# Altium PCB PCB1.PcbDoc
Units mm, origin at the board's own origin, x right, y up, seen from the top; angles counter-clockwise.
Board outline 60 x 60 mm, 4 copper layers (Top Layer, Signal Layer 1, Signal Layer 2, Bottom Layer), stack 0.778 mm thick; 15 components, 201 nets, 400 pads, 10 vias.
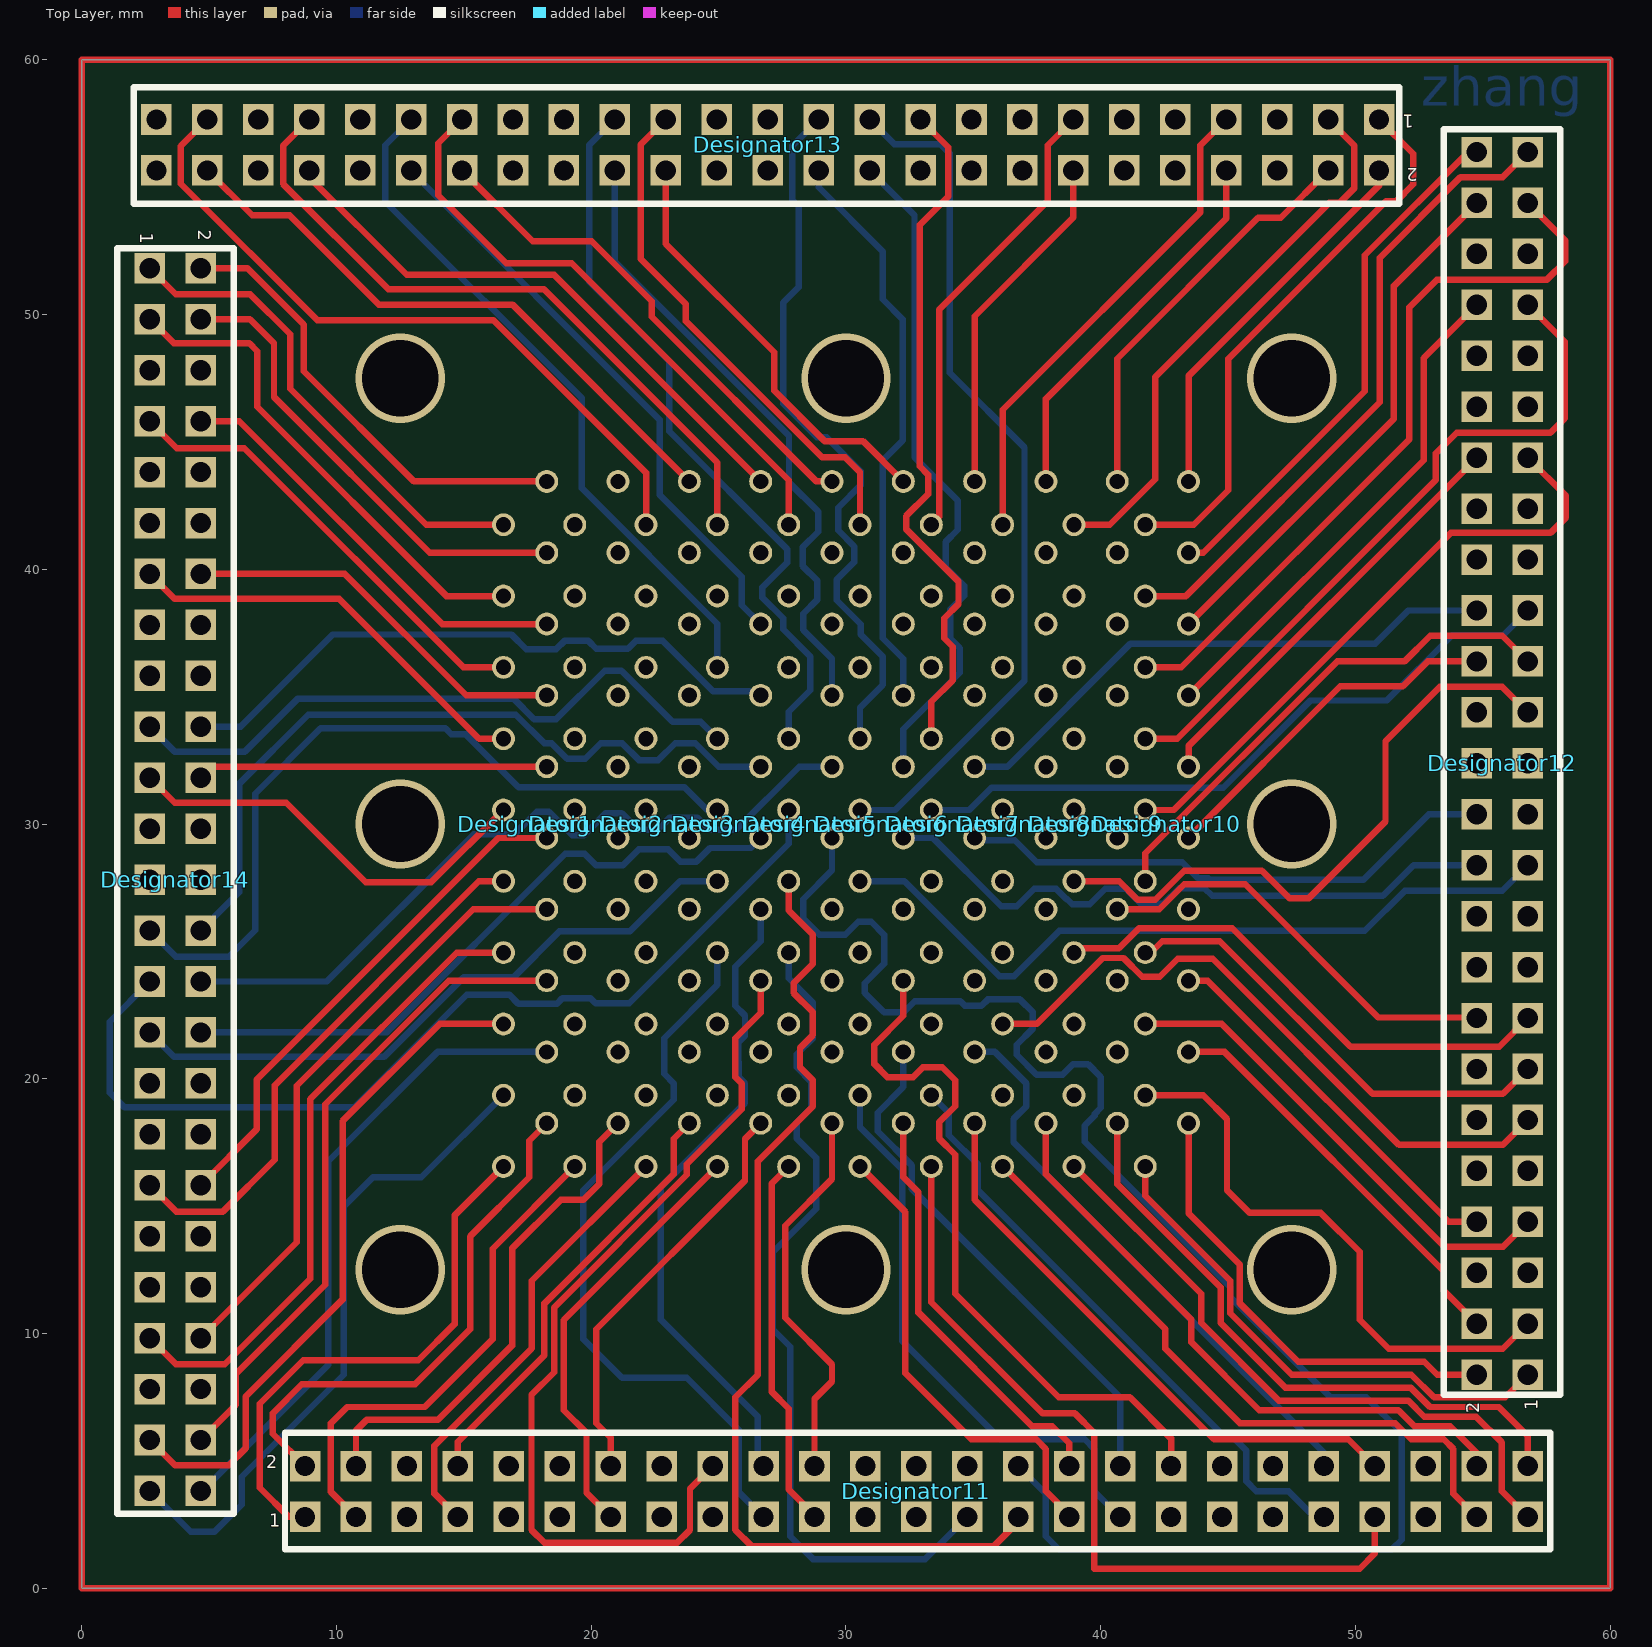
[diagram p0: Top Layer view]
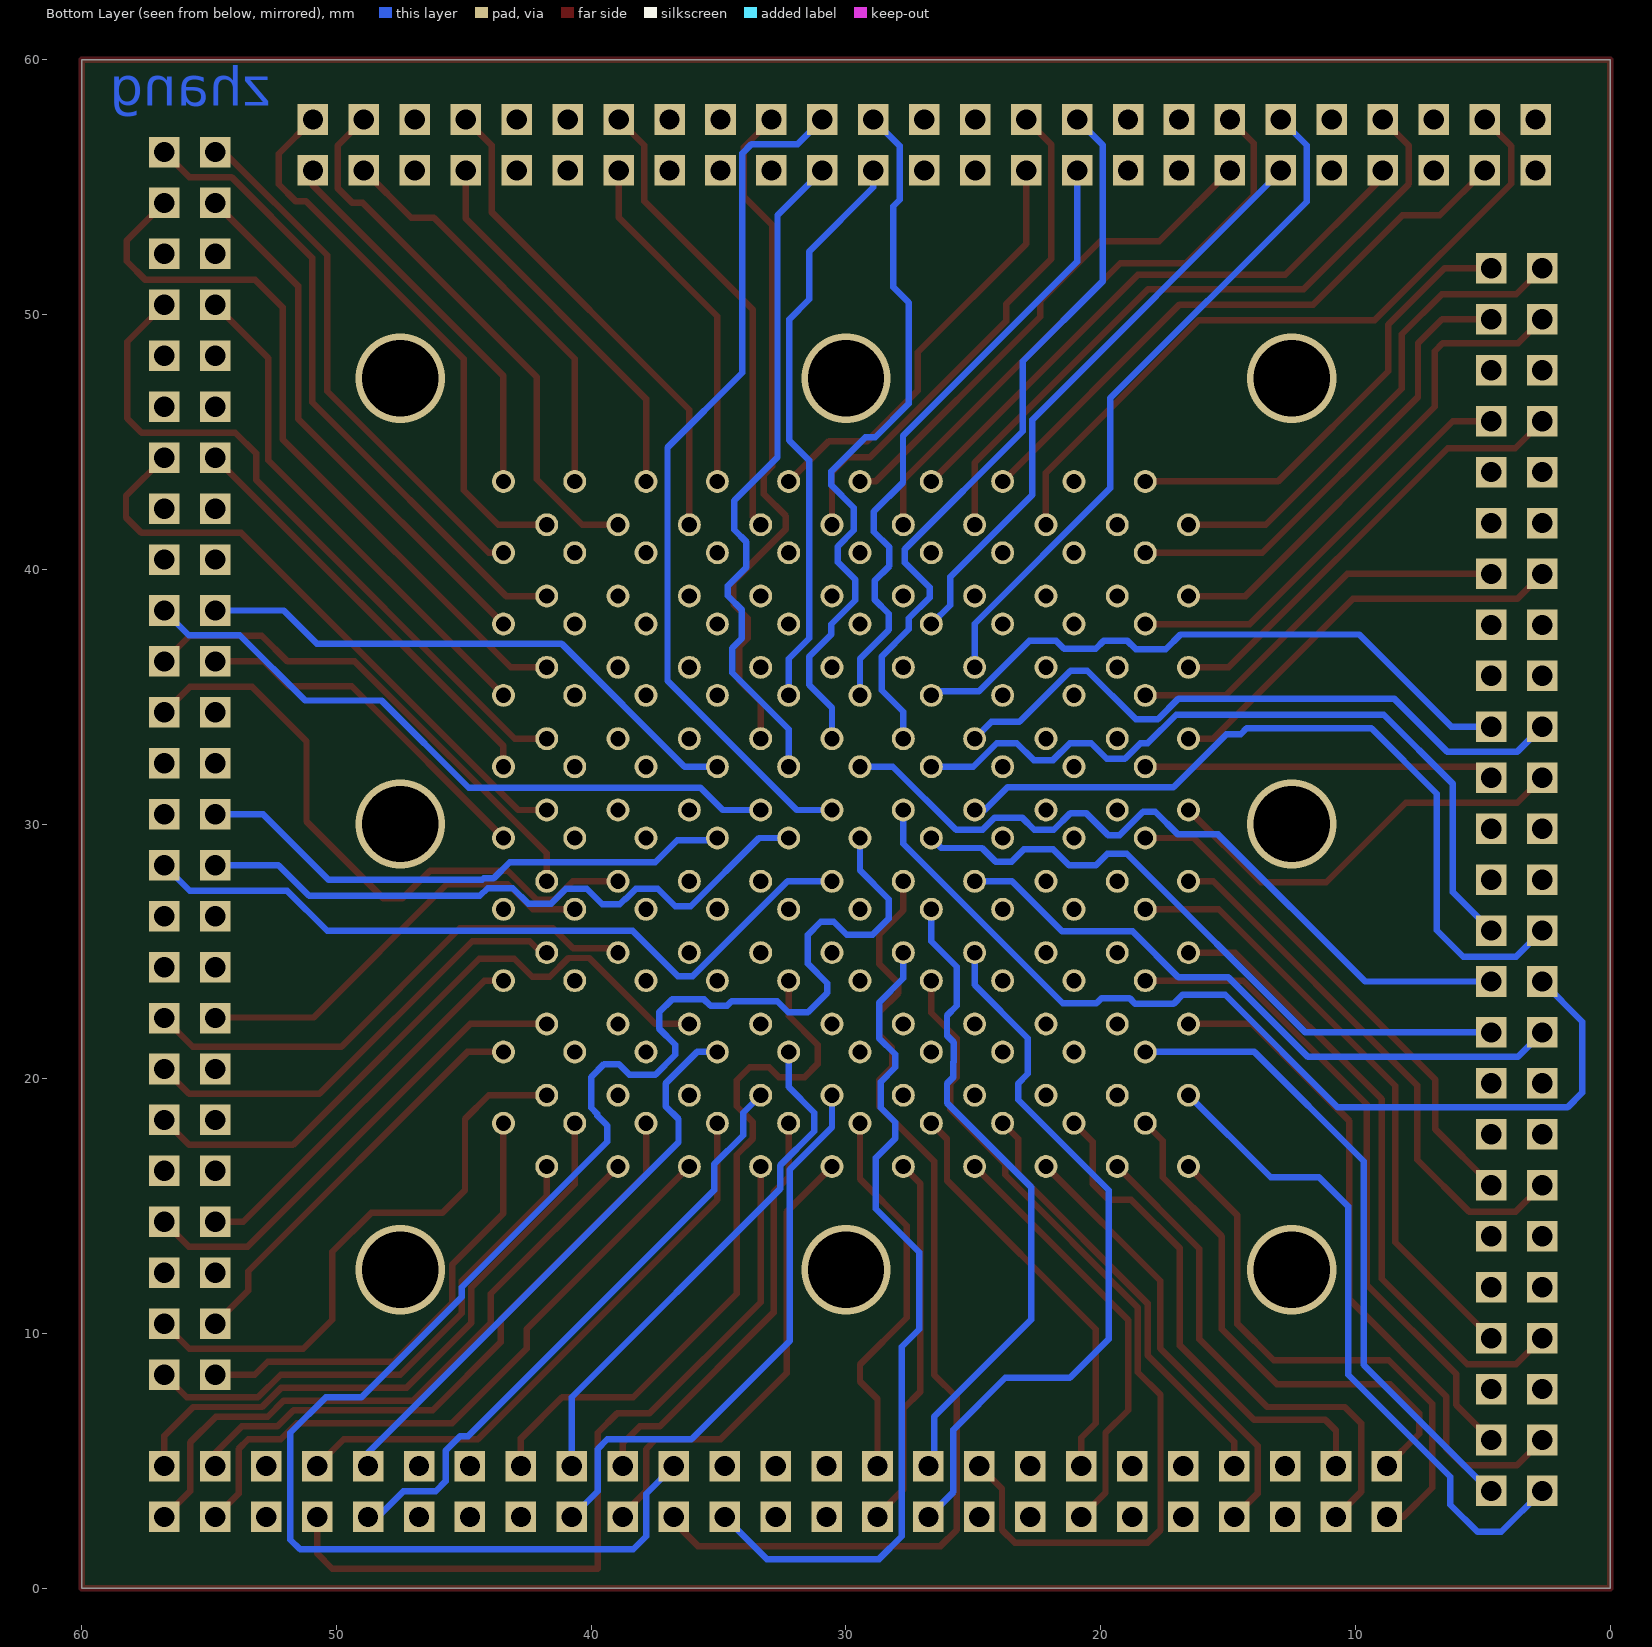
[diagram p1: Bottom Layer view, seen from below]
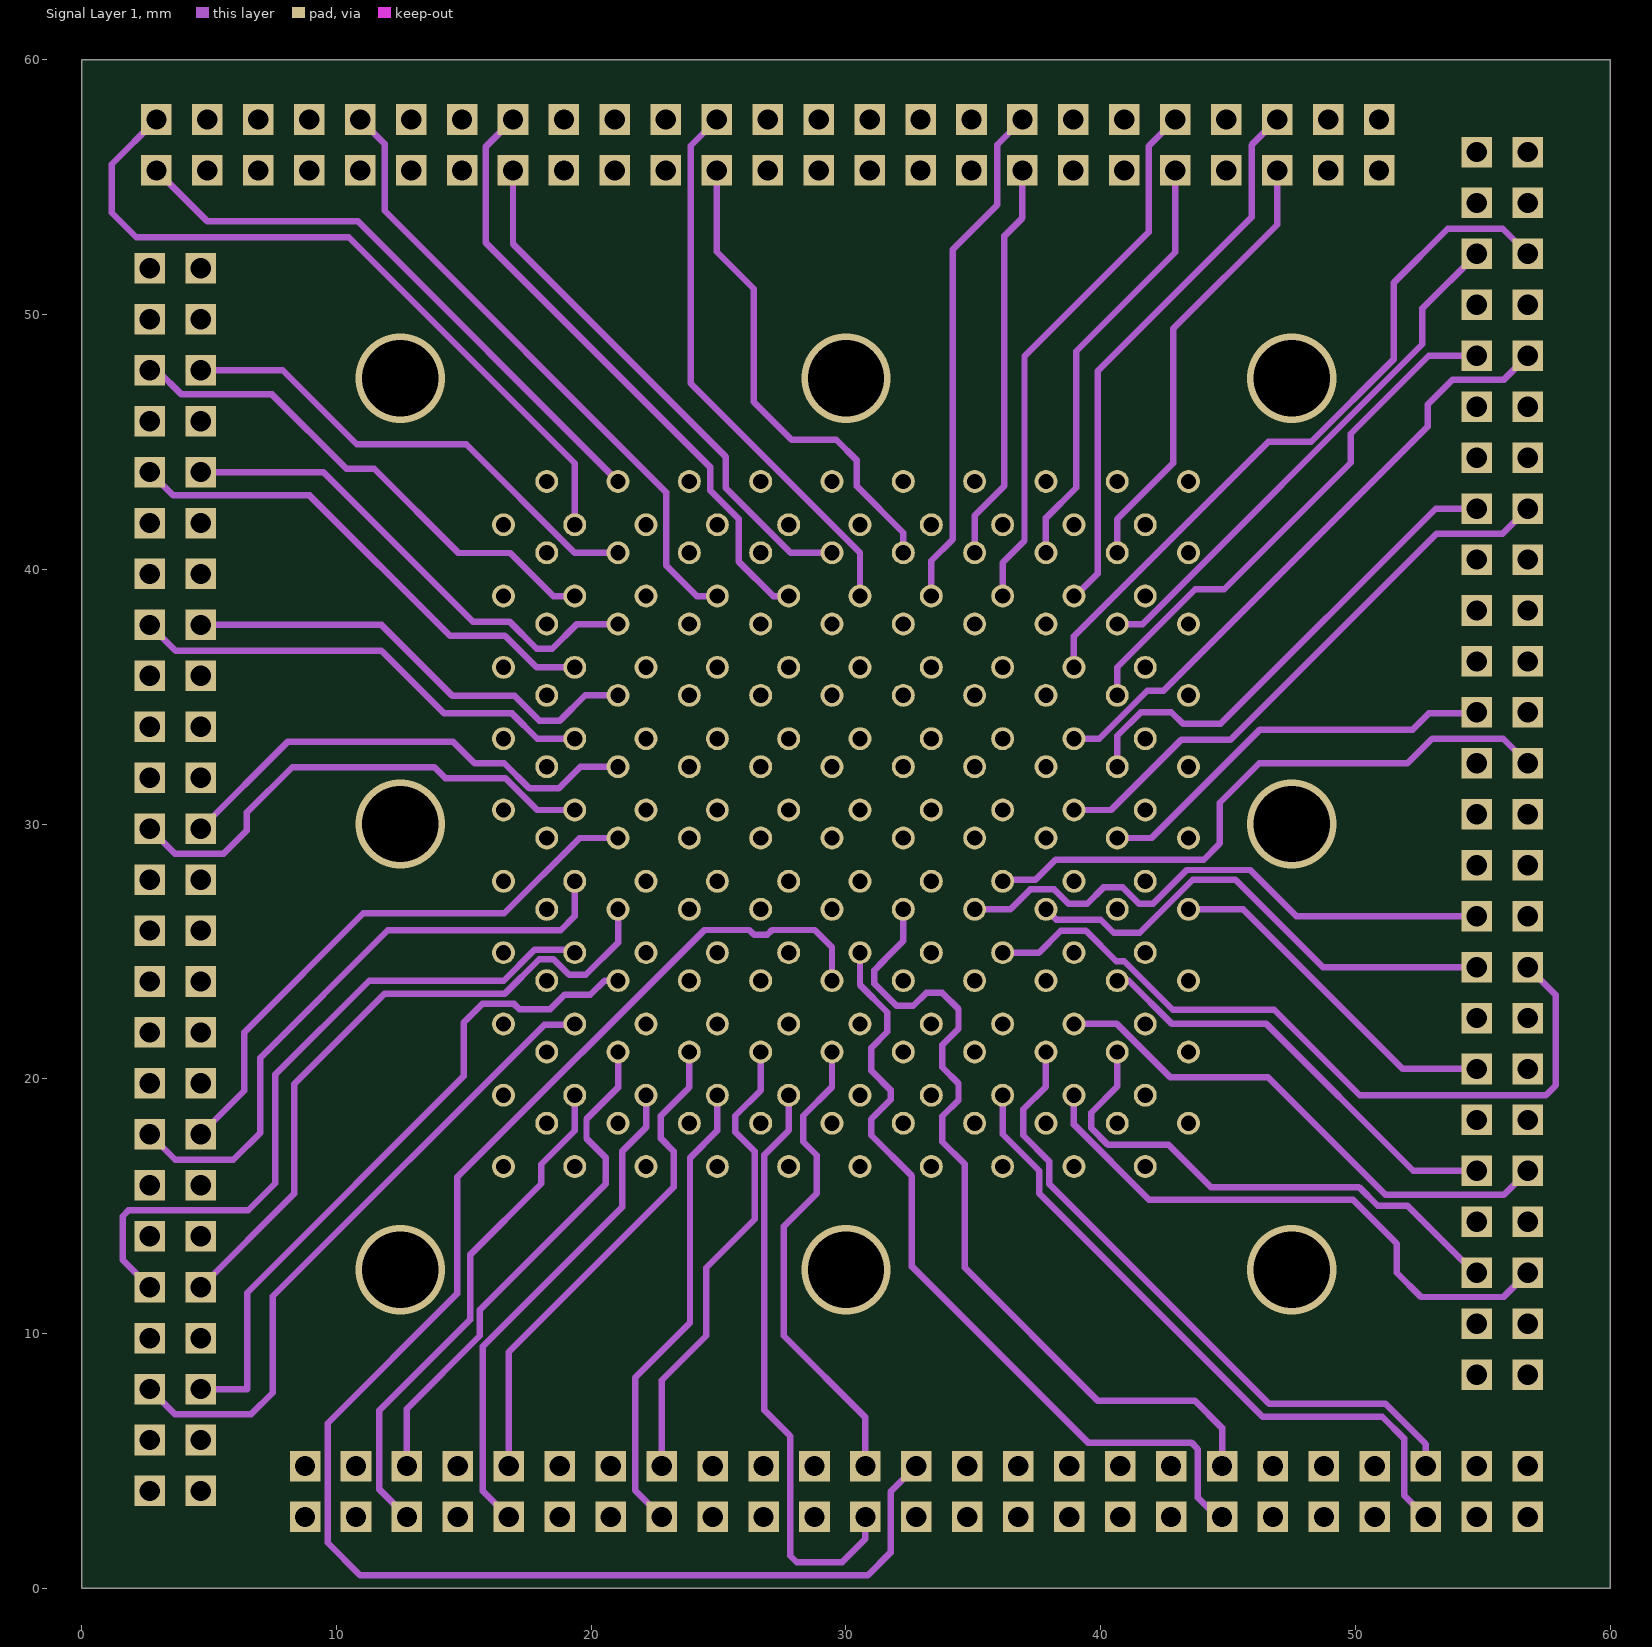
[diagram p2: Signal Layer 1]
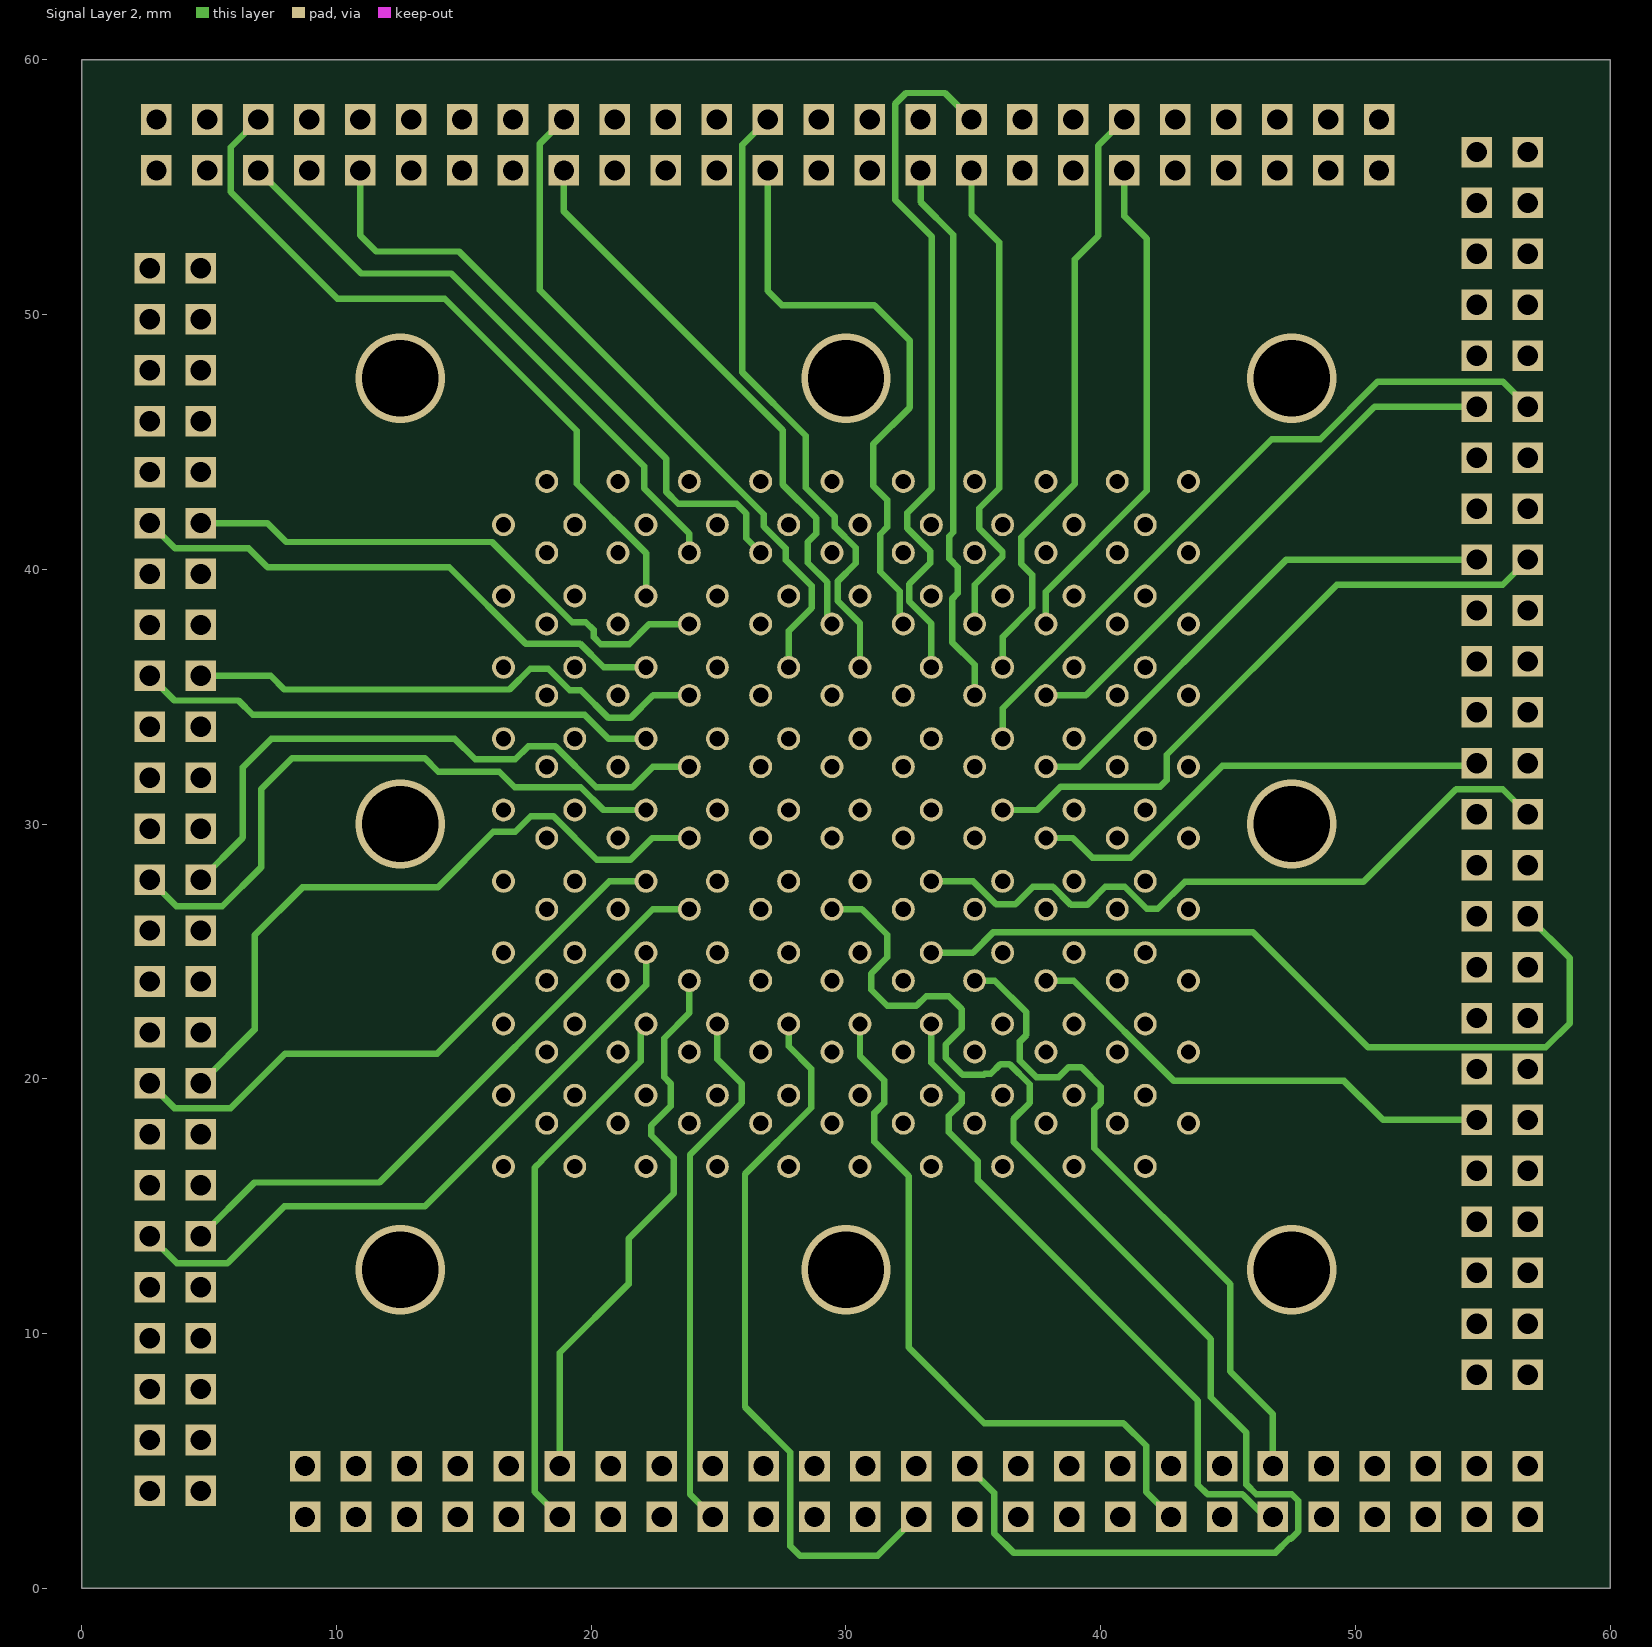
[diagram p3: Signal Layer 2]

## Layer stack, top to bottom
Top Solder: solder mask 0.0102, Solder Resist, Dk 3.5
Top Layer: signal copper 0.0356
3: core 0.254, FR-4, Dk 4.2
Signal Layer 1: signal copper 0.036
Dielectric 3: prepreg 0.127, Dk 4.2
Signal Layer 2: signal copper 0.036
4: core 0.254, Dk 4.2
Bottom Layer: signal copper 0.0356
Bottom Solder: solder mask 0.0102, Solder Resist, Dk 3.5

## Board outline
0,0 60,0 60,60 0,60

## Design rules (kind name [scope] priority, off if disabled: settings)
Clearance [All] p1: gap=0.127 ignorepadtopadclearanceinfootprint=FALSE except(0: Arc-Hole Track-Hole SMDPad-Hole THPad-Hole Via-Hole Fill-Hole Poly-Hole Region-Hole Text-Hole)
PolygonConnect [All] p1: connectstyle=Relief reliefconductorwidth=0.254 reliefentries=4 polygonreliefangle="90 Angle" airgapwidth=0.254
RoutingVias [All] p1: holewidth=0.711 width=1.27 viastyle="Through Hole" minholewidth=0.711 minwidth=1.27 maxholewidth=3.81 maxwidth=3.81
SolderMaskExpansion [All] p1: expansion=0.102
Width [All] p1: maxlimit=0.254 minlimit=0.254 preferedwidth=0.254
30 further rules are at their usual default settings.

## Components (designator, comment, footprint, x,y, rotation, side; value= is the part's Value field where it differs from the comment)
Designator1 "Comment" ZHANG10 16.55,16.55 r0 top
Designator2 "Comment" ZHANG10 19.35,16.55 r0 top
Designator3 "Comment" ZHANG10 22.15,16.55 r0 top
Designator3_7 "Comment" zhang 16.55,2539.975 r0 top
Designator4 "Comment" ZHANG10 24.95,16.55 r0 top
Designator5 "Comment" ZHANG10 27.75,16.55 r0 top
Designator6 "Comment" ZHANG10 30.55,16.55 r0 top
Designator7 "Comment" ZHANG10 33.35,16.55 r0 top
Designator8 "Comment" ZHANG10 36.15,16.55 r0 top
Designator9 "Comment" ZHANG10 38.95,16.55 r0 top
Designator10 "Comment" ZHANG10 41.75,16.55 r0 top
Designator11 "Comment" header-2MM#1 8.763,2.794 r90 top
Designator12 "Comment" header-2MM#2 56.769,8.382 r180 top
Designator13 "Comment" header-2MM#2 50.927,57.658 r270 top
Designator14 "Comment" header-2MM#2 2.667,51.816 r0 top

## Footprints (in the part's own frame and the unit in brackets; to place one, negate y for a bottom-side part, rotate by r counter-clockwise, add the part's x,y. Pads: shape width x height; smd on the part's side, far side on the other; paste and mask are expansions set on the pad)
header-2MM#1 [mm]
  rect 1.199x1.199 hole 0.798: 1(0,0) 2(2,0) 3(0,-2) 4(2,-2) 5(0,-4) 6(2,-4) 7(0,-6) 8(2,-6) 9(0,-8) 10(2,-8) 11(0,-10) 12(2,-10) 13(0,-12) 14(2,-12) 15(0,-14) 16(2,-14) 17(0,-16) 18(2,-16) 19(0,-18) 20(2,-18) 21(0,-20) 22(2,-20) 24(2,-22) 25(0,-24) 26(2,-24) 27(0,-26) 28(2,-26) 29(0,-28) 30(2,-28) 31(0,-30) 32(2,-30) 33(0,-32) 34(2,-32) 35(0,-34) 36(2,-34) 37(0,-36) 38(2,-36) 39(0,-38) 40(2,-38) 41(0,-40) 42(2,-40) 43(0,-42) 44(2,-42) 45(0,-44) 46(2,-44) 47(0,-46) 48(2,-46) 49(0,-48) 50(2,-48)
  rect 1.199x1.199 hole 0.798 mask+0.102: 23(0,-22)
  silkscreen extent -1.27,-48.89 3.3,0.79
header-2MM#2 [mm]
  rect 1.199x1.199 hole 0.798: 1(0,0) 2(2,0) 3(0,-2) 4(2,-2) 5(0,-4) 6(2,-4) 7(0,-6) 8(2,-6) 9(0,-8) 10(2,-8) 11(0,-10) 12(2,-10) 13(0,-12) 14(2,-12) 15(0,-14) 16(2,-14) 17(0,-16) 18(2,-16) 19(0,-18) 20(2,-18) 21(0,-20) 22(2,-20) 23(0,-22) 24(2,-22) 25(0,-24) 26(2,-24) 27(0,-26) 28(2,-26) 29(0,-28) 30(2,-28) 31(0,-30) 32(2,-30) 33(0,-32) 34(2,-32) 35(0,-34) 36(2,-34) 37(0,-36) 38(2,-36) 39(0,-38) 40(2,-38) 41(0,-40) 42(2,-40) 43(0,-42) 44(2,-42) 45(0,-44) 46(2,-44) 47(0,-46) 48(2,-46) 49(0,-48) 50(2,-48)
  silkscreen extent -1.27,-48.89 3.3,0.79
zhang [mm]
ZHANG10 [mm]
  round 0.9 hole 0.6: 1(0,0) 2(1.7,1.7) 3(0,2.8) 4(1.7,4.5) 5(0,5.6) 6(1.7,7.3) 7(0,8.4) 8(1.7,10.1) 9(0,11.2) 10(1.7,12.9) 11(0,14) 12(1.7,15.7) 13(0,16.8) 14(1.7,18.5) 15(0,19.6) 16(1.7,21.3) 17(0,22.4) 18(1.7,24.1) 19(0,25.2) 20(1.7,26.9)

## Via types
v1: diameter 3.5, hole 3, Top Layer to Bottom Layer, 8 vias
v2: diameter 1.27, hole 0.711, Top Layer to Bottom Layer, 2 vias

## Nets (pads, with @x,y where several pads share a name; then routed paths per layer and width w, separated by ;. In a path a pad name is that pad's centre, name@x,y a point inside that pad or via, vN(x,y) a via of type N, cw(c..) or ccw(c..) an arc to the next point about the centre after c; other vN are vias at no path point)
101: Designator1.1 Designator11.1 | length 21.5
  Top Layer w0.254: Designator11.1 8.128,2.794 6.985,3.937 6.985,7.239 8.692,8.946 13.208,8.946 14.631,10.369 14.631,14.631 Designator1.1
102: Designator1.2 Designator11.2 | length 21
  Top Layer w0.254: Designator11.2 7.493,6.064 7.493,6.858 8.636,8.001 13.081,8.001 15.24,10.16 15.24,13.803 17.566,16.129 17.566,17.566 Designator1.2
103: Designator1.3 Designator14.49 | length 26.2
  Bottom Layer w0.254: Designator14.49 4.273,2.21 5.207,2.21 6.274,3.277 6.274,4.369 10.287,8.382 10.287,14.986 11.43,16.129 13.329,16.129 Designator1.3
104: Designator1.4 Designator14.50 | length 25.4
  Bottom Layer w0.254: Designator14.50 4.73,3.816 9.677,8.763 9.677,16.764 13.963,21.05 Designator1.4
105: Designator1.5 Designator14.47 | length 26.8
  Top Layer w0.254: Designator14.47 3.657,4.826 5.766,4.826 6.426,5.486 6.426,7.518 10.236,11.328 10.236,18.339 14.047,22.15 Designator1.5
106: Designator1.6 Designator14.48 | length 25.9
  Top Layer w0.254: Designator14.48 6.045,7.194 6.045,8.407 9.55,11.913 9.55,18.999 14.401,23.85 Designator1.6
107: Designator1.7 Designator14.43 | length 25.1
  Top Layer w0.254: Designator14.43 3.695,8.788 5.613,8.788 8.966,12.141 8.966,19.202 14.714,24.95 Designator1.7
108: Designator1.8 Designator14.44 | length 24.2
  Top Layer w0.254: Designator14.44 8.433,13.582 8.433,19.721 15.362,26.65 Designator1.8
109: Designator1.9 Designator14.37 | length 21.4
  Top Layer w0.254: Designator14.37 3.7,14.783 5.537,14.783 7.569,16.815 7.569,19.736 15.583,27.75 Designator1.9
110: Designator1.10 Designator14.38 | length 20.4
  Top Layer w0.254: Designator14.38 6.858,18.007 6.858,19.964 16.344,29.45 Designator1.10
111: Designator1.11 Designator14.21 | length 16.8
  Top Layer w0.254: Designator14.21 3.647,30.836 8.026,30.836 11.151,27.711 13.711,27.711 Designator1.11
112: Designator1.12 Designator14.22 | length 13.8
  Top Layer w0.254: Designator14.22 5.101,32.25 Designator1.12
113: Designator1.13 Designator14.13 | length 16.6
  Top Layer w0.254: Designator14.13 3.646,38.837 10.109,38.837 15.596,33.35 Designator1.13
114: Designator1.14 Designator14.14 | length 15.6
  Top Layer w0.254: Designator14.14 10.324,39.816 15.09,35.05 Designator1.14
115: Designator1.15 Designator14.7 | length 17.9
  Top Layer w0.254: Designator14.7 3.728,44.755 6.375,44.755 14.98,36.15 Designator1.15
116: Designator1.16 Designator14.8 | length 16.9
  Top Layer w0.254: Designator14.8 6.178,45.816 14.144,37.85 Designator1.16
117: Designator1.17 Designator14.3 | length 19.7
  Top Layer w0.254: Designator14.3 3.613,48.87 6.579,48.87 6.883,48.565 6.883,46.38 14.314,38.95 Designator1.17
118: Designator1.18 Designator14.4 | length 18.6
  Top Layer w0.254: Designator14.4 6.597,49.816 7.544,48.87 7.544,46.761 13.655,40.65 Designator1.18
119: Designator1.19 Designator14.1 | length 19.3
  Top Layer w0.254: Designator14.1 3.683,50.8 6.604,50.8 8.179,49.225 8.179,47.092 13.52,41.75 Designator1.19
120: Designator1.20 Designator14.2 | length 18.1
  Top Layer w0.254: Designator14.2 6.502,51.816 8.712,49.606 8.712,47.777 13.04,43.45 Designator1.20
201: Designator2.1 Designator11.3 | length 19.9
  Top Layer w0.254: Designator11.3 9.779,3.778 9.779,6.477 10.414,7.112 13.462,7.112 16.129,9.779 16.129,13.329 Designator2.1
202: Designator2.2 Designator11.4 | length 19.9
  Top Layer w0.254: Designator11.4 10.763,6.191 11.176,6.604 13.97,6.604 16.891,9.525 16.891,13.335 18.796,15.24 19.685,15.24 20.32,15.875 20.32,17.52 Designator2.2
203: Designator2.3 Designator11.5 | length 20.2
  Signal Layer 1 w0.254: Designator11.5 11.684,3.873 11.684,6.985 15.24,10.541 15.24,13.081 18.034,15.875 18.034,16.637 19.35,17.953 Designator2.3
204: Designator2.4 Designator11.6 | length 20.3
  Signal Layer 1 w0.254: Designator11.6 12.763,7.048 15.621,9.906 15.621,10.922 20.574,15.875 20.574,16.891 19.812,17.653 19.812,18.415 21.05,19.653 Designator2.4
205: Designator2.5 Designator14.45 | length 25.7
  Signal Layer 1 w0.254: Designator14.45 3.65,6.833 6.655,6.833 7.493,7.671 7.493,11.455 18.161,22.123 19.323,22.123 Designator2.5
206: Designator2.6 Designator14.46 | length 26.6
  Signal Layer 1 w0.254: Designator14.46 6.495,7.816 6.495,11.601 14.986,20.091 14.986,22.2 15.723,22.936 16.967,22.936 17.17,22.733 18.39,22.733 18.948,23.292 19.964,23.292 20.523,23.85 Designator2.6
207: Designator2.7 Designator14.41 | length 27.9
  Signal Layer 1 w0.254: Designator14.41 1.6,12.883 1.6,14.605 1.829,14.834 6.528,14.834 7.595,15.9 7.595,20.168 11.278,23.851 16.561,23.851 17.78,25.07 19.23,25.07 Designator2.7
208: Designator2.8 Designator14.42 | length 26.3
  Signal Layer 1 w0.254: Designator14.42 8.331,15.48 8.331,19.787 11.887,23.343 16.612,23.343 17.958,24.689 18.517,24.689 19.126,24.079 19.787,24.079 21.05,25.343 Designator2.8
209: Designator2.9 Designator14.35 | length 24.2
  Signal Layer 1 w0.254: Designator14.35 3.668,16.815 5.944,16.815 7.01,17.882 7.01,20.828 12.014,25.832 18.796,25.832 19.35,26.386 Designator2.9
210: Designator2.10 Designator14.36 | length 22.5
  Signal Layer 1 w0.254: Designator14.36 6.375,19.524 6.375,21.819 11.049,26.492 16.586,26.492 19.544,29.45 Designator2.10
211: Designator2.11 Designator14.23 | length 19.6
  Signal Layer 1 w0.254: Designator14.23 3.654,28.829 5.563,28.829 6.477,29.743 6.477,30.455 8.255,32.233 13.843,32.233 14.275,31.801 16.632,31.801 17.882,30.55 Designator2.11
212: Designator2.12 Designator14.24 | length 18.9
  Signal Layer 1 w0.254: Designator14.24 8.074,33.223 14.58,33.223 15.418,32.385 16.586,32.385 17.577,31.394 18.72,31.394 19.575,32.25 Designator2.12
213: Designator2.13 Designator14.15 | length 18.5
  Signal Layer 1 w0.254: Designator14.15 3.678,36.805 11.76,36.805 14.224,34.341 16.891,34.341 17.882,33.35 Designator2.13
214: Designator2.14 Designator14.16 | length 18.3
  Signal Layer 1 w0.254: Designator14.16 11.765,37.816 14.554,35.027 16.993,35.027 17.958,34.061 18.771,34.061 19.759,35.05 Designator2.14
215: Designator2.15 Designator14.9 | length 19.9
  Signal Layer 1 w0.254: Designator14.9 3.582,42.901 8.941,42.901 14.453,37.389 16.612,37.389 17.85,36.15 Designator2.15
216: Designator2.16 Designator14.10 | length 19.7
  Signal Layer 1 w0.254: Designator14.10 9.473,43.816 15.342,37.948 16.789,37.948 17.856,36.881 18.466,36.881 19.435,37.85 Designator2.16
217: Designator2.17 Designator14.5 | length 20.4
  Signal Layer 1 w0.254: Designator14.5 2.959,47.816 3.912,46.863 7.468,46.863 10.389,43.942 11.481,43.942 14.783,40.64 16.815,40.64 18.505,38.95 Designator2.17
218: Designator2.18 Designator14.6 | length 19.4
  Signal Layer 1 w0.254: Designator14.6 7.886,47.816 10.795,44.907 15.088,44.907 19.345,40.65 Designator2.18
219: Designator2.19 Designator13.49 | length 29.1
  Signal Layer 1 w0.254: Designator13.49 1.168,55.899 1.168,54 2.134,53.035 10.481,53.035 19.35,44.166 Designator2.19
220: Designator2.20 Designator13.50 | length 23.2
  Signal Layer 1 w0.254: Designator13.50 4.915,53.67 10.83,53.67 Designator2.20
301: Designator3.1 Designator11.7 | length 17.6
  Top Layer w0.254: Designator11.7 13.843,3.714 13.843,5.588 17.665,9.41 17.665,12.065 Designator3.1
302: Designator3.2 Designator11.8 | length 17.2
  Top Layer w0.254: Designator11.8 14.763,5.746 18.161,9.144 18.161,11.176 23.241,16.256 23.241,17.641 Designator3.2
303: Designator3.3 Designator11.9 | length 19.6
  Signal Layer 1 w0.254: Designator11.9 15.748,3.809 15.748,9.494 21.209,14.955 21.209,17.145 22.15,18.086 Designator3.3
304: Designator3.4 Designator11.10 | length 19.6
  Signal Layer 1 w0.254: Designator11.10 16.763,9.27 23.241,15.748 23.241,17.145 22.733,17.653 22.733,18.542 23.85,19.659 Designator3.4
305: Designator3.5 Designator11.11 | length 21.6
  Signal Layer 2 w0.254: Designator11.11 17.78,3.777 17.78,16.51 18.034,16.764 18.034,16.777 21.939,20.682 21.939,21.939 Designator3.5
306: Designator3.6 Designator11.12 | length 22.1
  Signal Layer 2 w0.254: Designator11.12 18.763,9.238 21.463,11.938 21.463,13.716 23.241,15.494 23.241,16.891 22.352,17.78 22.352,18.161 23.114,18.923 23.114,19.812 22.86,20.066 22.86,21.59 23.85,22.58 Designator3.6
307: Designator3.7 Designator14.39 | length 25.7
  Signal Layer 2 w0.254: Designator14.39 3.732,12.751 5.715,12.751 7.95,14.986 13.462,14.986 22.15,23.674 Designator3.7
308: Designator3.8 Designator14.40 | length 24.5
  Signal Layer 2 w0.254: Designator14.40 6.777,15.926 11.684,15.926 22.408,26.65 Designator3.8
309: Designator3.9 Designator14.33 | length 23.6
  Signal Layer 2 w0.254: Designator14.33 3.636,18.847 5.842,18.847 7.976,20.98 13.945,20.98 20.714,27.75 Designator3.9
310: Designator3.10 Designator14.34 | length 26.7
  Signal Layer 2 w0.254: Designator14.34 6.782,21.931 6.782,25.629 8.661,27.508 13.97,27.508 16.154,29.693 17.018,29.693 17.628,30.302 18.517,30.302 20.218,28.6 21.539,28.6 22.389,29.45 Designator3.10
311: Designator3.11 Designator14.25 | length 25
  Signal Layer 2 w0.254: Designator14.25 3.711,26.772 5.512,26.772 7.036,28.296 7.036,31.369 8.255,32.588 13.462,32.588 13.995,32.055 16.383,32.055 16.993,31.445 19.583,31.445 20.479,30.55 Designator3.11
312: Designator3.12 Designator14.26 | length 24.6
  Signal Layer 2 w0.254: Designator14.26 6.325,29.474 6.325,32.233 7.442,33.35 14.63,33.35 15.443,32.537 17.018,32.537 17.526,33.045 18.593,33.045 20.193,31.445 21.615,31.445 22.42,32.25 Designator3.12
313: Designator3.13 Designator14.17 | length 20.5
  Signal Layer 2 w0.254: Designator14.17 3.634,34.849 6.147,34.849 6.706,34.29 19.736,34.29 20.676,33.35 Designator3.13
314: Designator3.14 Designator14.18 | length 20.9
  Signal Layer 2 w0.254: Designator14.18 7.415,35.816 7.95,35.281 16.789,35.281 17.602,36.093 18.313,36.093 19.152,35.255 19.583,35.255 20.676,34.163 21.539,34.163 22.426,35.05 Designator3.14
315: Designator3.15 Designator14.11 | length 21.8
  Signal Layer 2 w0.254: Designator14.11 3.665,40.818 6.553,40.818 7.29,40.081 14.423,40.081 17.42,37.084 19.553,37.084 20.487,36.15 Designator3.15
316: Designator3.16 Designator14.12 | length 21.6
  Signal Layer 2 w0.254: Designator14.12 7.282,41.816 8.026,41.072 16.104,41.072 19.253,37.922 19.787,37.922 20.091,37.617 20.091,37.338 20.371,37.059 21.488,37.059 22.28,37.85 Designator3.16
317: Designator3.17 Designator13.45 | length 28.4
  Signal Layer 2 w0.254: Designator13.45 5.842,56.573 5.842,54.813 10.033,50.622 14.249,50.622 19.431,45.441 19.431,43.358 22.15,40.639 Designator3.17
318: Designator3.18 Designator13.46 | length 24.1
  Signal Layer 2 w0.254: Designator13.46 10.972,51.613 14.503,51.613 22.073,44.044 22.073,43.18 23.85,41.403 Designator3.18
319: Designator3.19 Designator13.47 | length 28
  Top Layer w0.254: Designator13.47 3.886,56.617 3.886,55.141 9.243,49.784 16.154,49.784 22.15,43.788 Designator3.19
320: Designator3.20 Designator13.48 | length 24
  Top Layer w0.254: Designator13.48 6.686,53.899 8.153,53.899 11.659,50.394 16.906,50.394 Designator3.20
401: Designator4.1 Designator11.13 | length 17
  Top Layer w0.254: Designator11.13 19.812,3.745 19.812,6.096 18.923,6.985 18.923,10.523 Designator4.1
402: Designator4.2 Designator11.14 | length 16.4
  Top Layer w0.254: Designator11.14 20.763,5.907 20.193,6.477 20.193,10.16 26.035,16.002 26.035,17.635 Designator4.2
403: Designator4.3 Designator11.15 | length 18.3
  Signal Layer 1 w0.254: Designator11.15 21.717,3.84 21.717,8.255 23.876,10.414 23.876,16.891 24.95,17.965 Designator4.3
404: Designator4.4 Designator11.16 | length 18.5
  Signal Layer 1 w0.254: Designator11.16 22.763,8.158 24.511,9.906 24.511,12.573 26.416,14.478 26.416,17.145 25.654,17.907 25.654,18.542 26.65,19.538 Designator4.4
405: Designator4.5 Designator11.17 | length 21
  Signal Layer 2 w0.254: Designator11.17 23.876,3.681 23.876,17.018 25.908,19.05 25.908,19.812 24.95,20.77 Designator4.5
406: Designator4.6 Designator11.18 | length 35
  Top Layer w0.254: Designator11.18 23.876,3.907 23.876,2.286 23.368,1.778 18.161,1.778 17.653,2.286 17.653,7.589 18.542,8.478 18.542,11.018 23.749,16.225 23.749,16.637 25.908,18.796 25.908,19.812 25.654,20.066 25.654,21.59 26.65,22.586 Designator4.6
407: Designator4.7 Designator11.19 | length 29.1
  Bottom Layer w0.254: Designator4.7 24.95,23.68 22.86,21.59 22.86,20.193 23.241,19.812 23.241,19.177 22.86,18.796 19.685,15.621 19.685,9.779 21.209,8.255 23.749,8.255 25.781,6.223 25.781,3.776 Designator11.19
408: Designator4.8 Designator11.20 | length 25.7
  Bottom Layer w0.254: Designator4.8 26.65,25.393 25.654,24.397 25.654,22.86 26.035,22.479 26.035,21.692 25.761,21.418 25.761,20.662 25.781,20.642 25.781,20.066 26.035,19.812 26.035,19.05 22.733,15.748 22.733,10.541 26.543,6.731 26.543,5.014 Designator11.20
409: Designator4.9 Designator14.31 | length 25.5
  Bottom Layer w0.254: Designator14.31 3.63,20.853 11.862,20.853 14.986,23.978 16.942,23.978 18.745,25.781 21.514,25.781 23.483,27.75 Designator4.9
410: Designator4.10 Designator14.32 | length 25.9
  Bottom Layer w0.254: Designator14.32 11.961,21.816 18.974,28.829 19.736,28.829 20.193,28.372 21.234,28.372 21.869,29.007 23.012,29.007 23.495,28.524 24.13,28.524 24.663,29.058 26.258,29.058 Designator4.10
411: Designator4.11 Designator14.27 | length 30.9
  Bottom Layer w0.254: Designator14.27 3.693,24.79 5.766,24.79 6.807,25.832 6.807,31.191 9.373,33.757 14.275,33.757 14.504,33.527 15.063,33.527 17.145,31.445 23.659,31.445 24.554,30.55 Designator4.11
412: Designator4.12 Designator14.28 | length 29.9
  Bottom Layer w0.254: Designator14.28 6.172,27.321 6.172,31.572 8.89,34.29 17.038,34.29 18.161,33.167 18.161,33.172 18.44,33.172 19.05,32.563 19.761,32.563 20.371,33.172 21.209,33.172 21.869,32.512 22.631,32.512 23.292,33.172 24.079,33.172 25.002,32.25 Designator4.12
413: Designator4.13 Designator14.19 | length 25.8
  Bottom Layer w0.254: Designator14.19 3.641,32.842 6.401,32.842 8.484,34.925 16.942,34.925 17.755,34.112 18.618,34.112 20.523,36.017 21.184,36.017 23.19,34.011 24.289,34.011 Designator4.13
414: Designator4.14 Designator14.20 | length 25
  Bottom Layer w0.254: Designator14.20 6.232,33.816 9.855,37.44 16.866,37.44 17.45,36.855 18.618,36.855 18.948,37.186 19.888,37.186 20.193,36.881 21.438,36.881 21.742,37.186 22.809,37.186 24.79,35.204 26.496,35.204 Designator4.14
415: Designator4.15 Designator13.39 | length 27.3
  Bottom Layer w0.254: Designator13.39 11.913,56.644 11.913,54.432 19.634,46.711 19.634,43.18 24.95,37.864 Designator4.15
416: Designator4.16 Designator13.40 | length 23.5
  Bottom Layer w0.254: Designator13.40 12.927,55.628 22.682,45.872 22.682,42.926 25.908,39.7 25.908,38.592 Designator4.16
417: Designator4.17 Designator13.41 | length 25
  Signal Layer 1 w0.254: Designator13.41 11.887,56.698 11.887,54.077 22.936,43.028 22.936,40.157 24.144,38.95 Designator4.17
418: Designator4.18 Designator13.42 | length 24.8
  Signal Layer 2 w0.254: Designator13.42 10.927,53.106 11.557,52.476 14.808,52.476 22.936,44.348 22.936,43.053 23.419,42.57 25.705,42.57 26.086,42.189 26.086,41.214 Designator4.18
419: Designator4.19 Designator13.43 | length 27
  Top Layer w0.254: Designator13.43 7.899,56.63 7.899,55.128 12.024,51.003 18.136,51.003 24.95,44.189 Designator4.19
420: Designator4.20 Designator13.44 | length 22.9
  Top Layer w0.254: Designator13.44 8.927,55.386 12.751,51.562 18.538,51.562 Designator4.20
501: Designator5.1 Designator11.21 | length 14.7
  Top Layer w0.254: Designator5.1 27.076,15.876 27.076,7.716 27.75,7.042 27.75,3.873 Designator11.21@28.763,2.86
502: Designator5.2 Designator11.22 | length 15.3
  Top Layer w0.254: Designator11.22 28.763,7.427 29.45,8.114 29.45,8.777 27.61,10.617 27.61,14.224 29.45,16.064 Designator5.2
503: Designator5.3 Designator11.23 | length 23.2
  Signal Layer 1 w0.254: Designator5.3 27.75,17.971 26.797,17.018 26.797,6.985 27.813,5.969 27.813,1.27 28.067,1.016 29.845,1.016 30.763,1.934 Designator11.23
504: Designator5.4 Designator11.24 | length 18.8
  Signal Layer 1 w0.254: Designator5.4 29.45,19.671 28.321,18.542 28.321,17.526 28.854,16.993 28.854,15.494 27.559,14.199 27.559,9.906 30.763,6.702 Designator11.24
505: Designator5.5 Designator11.25 | length 28.4
  Signal Layer 2 w0.254: Designator5.5 27.75,21.272 28.639,20.383 28.639,18.86 26.035,16.256 26.035,7.112 27.813,5.334 27.813,1.651 28.194,1.27 31.239,1.27 Designator11.25
506: Designator5.6 Designator11.26 | length 63.7
  Signal Layer 1 w0.254: Designator5.6 29.45,25.16 28.771,25.839 27.096,25.839 26.911,25.654 26.389,25.654 26.204,25.839 24.442,25.839 14.732,16.129 14.732,11.557 9.652,6.477 9.652,1.778 10.922,0.508 30.861,0.508 31.75,1.397 31.75,3.781 Designator11.26
507: Designator5.7 Designator11.27 | length 33.4
  Bottom Layer w0.254: Designator5.7 27.75,23.939 28.702,22.987 28.702,21.59 28.067,20.955 28.067,20.447 28.639,19.875 28.639,18.86 28.067,18.288 28.067,17.653 28.829,16.891 28.829,14.891 27.127,13.189 27.127,10.16 27.813,9.474 27.813,2.032 28.702,1.143 33.112,1.143 Designator11.27
508: Designator5.8 Designator11.28 | length 54.4
  Signal Layer 2 w0.254: Designator5.8 30.627,26.65 31.623,25.654 31.623,24.765 30.988,24.13 30.988,23.495 31.623,22.86 32.766,22.86 33.147,23.241 34.036,23.241 34.544,22.733 34.544,21.971 33.909,21.336 33.909,20.828 34.576,20.161 35.418,20.161 35.45,20.193 35.687,20.193 36.068,20.574 36.418,20.574 37.211,19.781 37.211,19.05 36.576,18.415 36.576,17.526 44.323,9.779 44.323,7.493 45.72,6.096 45.72,4.068 46.105,3.683 47.498,3.683 47.752,3.429 47.752,2.225 47.468,1.941 47.407,1.941 46.863,1.397 36.576,1.397 35.814,2.159 35.814,3.743 Designator11.28
509: Designator5.9 Designator11.29 | length 40.1
  Top Layer w0.254: Designator5.9 27.75,26.606 28.702,25.654 28.702,24.511 27.94,23.749 27.94,23.368 28.702,22.606 28.702,21.717 28.194,21.209 28.194,20.447 28.702,19.939 28.702,18.923 26.543,16.764 26.543,8.382 25.654,7.493 25.654,2.286 26.289,1.651 35.814,1.651 36.763,2.6 Designator11.29
510: Designator5.10 Designator11.30 | length 65.5
  Bottom Layer w0.254: Designator5.10 29.45,28.18 28.321,27.051 28.321,26.289 28.956,25.654 29.972,25.654 30.48,26.162 30.988,26.162 31.496,25.654 31.496,24.511 30.734,23.749 30.734,23.368 31.496,22.606 32.263,22.606 32.696,23.039 34.492,23.039 34.671,22.86 35.317,22.86 35.571,23.114 36.83,23.114 37.338,22.606 37.338,21.971 36.703,21.336 36.703,20.94 37.482,20.161 38.504,20.161 38.917,20.574 39.497,20.574 40.005,20.066 40.005,18.862 39.761,18.618 39.761,18.552 39.37,18.161 39.37,17.526 45.085,11.811 45.085,11.43 49.022,7.493 50.419,7.493 51.816,6.096 51.816,1.905 51.435,1.524 38.354,1.524 37.846,2.032 37.846,3.711 Designator11.30
511: Designator5.11 Designator14.29 | length 38
  Bottom Layer w0.254: Designator14.29 1.092,22.241 1.092,19.456 1.676,18.872 10.693,18.872 15.113,23.292 16.789,23.292 17.145,22.936 18.644,22.936 18.872,23.165 19.964,23.165 20.168,22.962 21.489,22.962 27.75,29.222 Designator5.11
512: Designator5.12 Designator14.30 | length 30
  Bottom Layer w0.254: Designator14.30 9.617,23.816 15.392,29.591 16.967,29.591 17.856,30.48 18.339,30.48 19.253,29.566 19.71,29.566 20.574,30.429 21.184,30.429 21.844,29.769 22.606,29.769 23.089,30.251 24.155,30.251 24.638,29.769 25.679,29.769 28.161,32.25 Designator5.12
513: Designator5.13 Designator13.31 | length 29.5
  Bottom Layer w0.254: Designator13.31 19.914,56.645 19.914,51.316 23.063,48.166 23.063,45.415 27.686,40.792 27.686,40.259 26.721,39.294 26.721,38.887 27.534,38.075 27.534,37.643 28.6,36.576 28.6,35.255 27.75,34.405 Designator5.13
514: Designator5.14 Designator13.32 | length 25.1
  Bottom Layer w0.254: Designator13.32 20.927,52.073 27.762,45.237 27.762,43.409 28.905,42.266 28.905,41.478 28.296,40.869 28.296,40.132 28.88,39.548 28.88,38.811 28.321,38.252 28.321,37.617 29.45,36.488 Designator5.14
515: Designator5.15 Designator13.33 | length 26.7
  Signal Layer 2 w0.254: Designator13.33 17.983,56.714 17.983,50.952 26.772,42.164 26.772,41.681 27.635,40.818 27.635,40.361 28.651,39.345 28.651,38.481 27.75,37.58 Designator5.15
516: Designator5.16 Designator13.34 | length 22.4
  Signal Layer 2 w0.254: Designator13.34 18.927,54.047 27.508,45.466 27.508,43.332 28.829,42.012 28.829,41.402 28.499,41.072 28.499,40.259 29.261,39.497 29.261,38.039 Designator5.16
517: Designator5.17 Designator13.35 | length 24.4
  Signal Layer 1 w0.254: Designator13.35 15.85,56.581 15.85,52.832 24.663,44.018 24.663,43.104 25.781,41.986 25.781,40.31 27.141,38.95 Designator5.17
518: Designator5.18 Designator13.36 | length 21.1
  Signal Layer 1 w0.254: Designator13.36 16.927,52.771 25.273,44.425 25.273,43.2 27.823,40.65 Designator5.18
519: Designator5.19 Designator13.37 | length 23.5
  Top Layer w0.254: Designator13.37 13.995,56.726 13.995,54.686 16.662,52.019 19.228,52.019 27.75,43.497 Designator5.19
520: Designator5.20 Designator13.38 | length 19.9
  Top Layer w0.254: Designator13.38 17.702,52.883 20.017,52.883 22.375,50.525 22.375,49.913 28.838,43.45 Designator5.20
601: Designator6.1 Designator11.31 | length 18.6
  Top Layer w0.254: Designator6.1 32.334,14.766 32.334,8.433 34.925,5.842 37.465,5.842 37.846,5.461 37.846,3.81 38.763,2.893 Designator11.31
602: Designator6.2 Designator11.32 | length 16.6
  Top Layer w0.254: Designator6.2 32.25,16.137 32.842,15.545 32.842,10.82 37.313,6.35 38.1,6.35 38.763,5.687 Designator11.32
603: Designator6.3 Designator11.33 | length 22.7
  Bottom Layer w0.254: Designator6.3 30.55,18.091 32.207,16.434 32.207,9.703 36.068,5.842 39.37,5.842 39.751,5.461 39.751,3.806 Designator11.33
604: Designator6.4 Designator11.34 | length 20.6
  Bottom Layer w0.254: Designator6.4 32.25,19.677 31.242,18.669 31.242,17.938 32.588,16.592 32.588,15.672 40.763,7.497 Designator11.34
605: Designator6.5 Designator11.35 | length 27.9
  Signal Layer 2 w0.254: Designator6.5 30.55,20.885 31.496,19.939 31.496,19.039 31.115,18.658 31.115,17.526 32.461,16.18 32.461,9.449 35.433,6.477 40.894,6.477 41.783,5.588 41.783,3.774 Designator11.35
606: Designator6.6 Designator11.36 | length 28.3
  Top Layer w0.254: Designator6.6 32.25,22.471 31.115,21.336 31.115,20.574 31.623,20.066 32.639,20.066 33.02,20.447 33.782,20.447 34.29,19.939 34.29,18.923 33.655,18.288 33.655,17.653 34.29,17.018 34.29,11.557 38.354,7.493 41.148,7.493 42.763,5.878 Designator11.36
607: Designator6.7 Designator11.37 | length 31.7
  Signal Layer 1 w0.254: Designator6.7 30.55,23.679 31.623,22.606 31.623,21.844 30.988,21.209 30.988,20.32 31.75,19.558 31.75,19.177 30.988,18.415 30.988,17.78 32.588,16.18 32.588,12.624 39.497,5.715 43.561,5.715 43.815,5.461 43.815,3.556 44.577,2.794 Designator11.37
608: Designator6.8 Designator11.38 | length 33
  Signal Layer 1 w0.254: Designator6.8 32.25,25.408 31.496,24.654 31.496,24.638 31.115,24.257 31.115,23.728 31.983,22.86 32.639,22.86 33.147,23.368 33.782,23.368 34.417,22.733 34.417,21.96 33.782,21.325 33.782,20.447 34.417,19.812 34.417,19.16 33.782,18.525 33.782,17.526 34.671,16.637 34.671,12.573 39.878,7.366 43.688,7.366 44.763,6.291 Designator11.38
609: Designator6.9 Designator12.21 | length 29.6
  Bottom Layer w0.254: Designator6.9 32.296,27.75 36.017,24.028 36.601,24.028 38.379,25.806 50.368,25.806 51.943,27.381 55.768,27.381 Designator12.21
610: Designator6.10 Designator12.22 | length 25.5
  Bottom Layer w0.254: Designator6.10 33.415,29.45 36.093,26.772 36.703,26.772 37.389,27.457 38.247,27.457 38.658,27.046 38.689,27.046 38.887,26.848 39.573,26.848 40.183,27.457 40.996,27.457 41.58,26.873 42.469,26.873 43.078,27.483 44.069,27.483 44.374,27.178 51.079,27.178 52.283,28.382 Designator12.22
611: Designator6.11 Designator13.21 | length 34.2
  Bottom Layer w0.254: Designator6.11 31.934,30.55 37.008,35.624 37.008,44.78 34.074,47.714 34.074,56.325 33.706,56.693 31.892,56.693 Designator13.21
612: Designator6.12 Designator13.22 | length 26.7
  Bottom Layer w0.254: Designator13.22 32.69,53.895 32.69,44.399 34.392,42.697 34.392,41.554 33.909,41.072 33.909,40.081 34.646,39.345 34.646,38.964 34.087,38.405 34.087,37.287 34.468,36.906 34.468,35.941 32.25,33.723 Designator6.12
613: Designator6.13 Designator13.23 | length 28.6
  Bottom Layer w0.254: Designator13.23 27.889,56.62 27.889,54.508 28.143,54.254 28.143,51.079 27.534,50.47 27.534,46.507 28.854,45.187 29.235,45.187 30.582,43.84 30.582,43.307 29.693,42.418 29.693,41.529 30.328,40.894 30.328,40.284 29.642,39.599 29.642,38.786 30.582,37.846 30.582,37.44 31.445,36.576 31.445,35.458 30.55,34.563 Designator6.13
614: Designator6.14 Designator13.24 | length 22.6
  Bottom Layer w0.254: Designator13.24 28.927,54.995 31.445,52.476 31.445,50.597 32.233,49.809 32.233,45.06 31.445,44.272 31.445,37.287 32.25,36.482 Designator6.14
615: Designator6.15 Designator13.25 | length 24.4
  Signal Layer 2 w0.254: Designator13.25 25.933,56.664 25.933,47.727 28.423,45.237 28.423,43.205 29.566,42.062 29.566,41.656 30.378,40.843 30.378,40.234 29.667,39.522 29.667,38.76 30.55,37.878 Designator6.15
616: Designator6.16 Designator13.26 | length 23.6
  Signal Layer 2 w0.254: Designator13.26 26.927,50.927 27.486,50.368 31.115,50.368 32.512,48.971 32.512,46.355 31.064,44.907 31.064,43.282 31.623,42.723 31.623,41.656 31.344,41.377 31.344,39.903 32.106,39.141 32.106,37.994 Designator6.16
617: Designator6.17 Designator13.27 | length 21.9
  Signal Layer 1 w0.254: Designator13.27 23.901,56.632 23.901,47.295 30.55,40.646 Designator6.17
618: Designator6.18 Designator13.28 | length 19.1
  Signal Layer 1 w0.254: Designator13.28 24.927,52.467 26.378,51.016 26.378,46.571 27.864,45.085 29.616,45.085 30.429,44.272 30.429,43.256 32.25,41.435 Designator6.18
619: Designator6.19 Designator13.29 | length 20.4
  Top Layer w0.254: Designator13.29 21.946,56.677 21.946,52.182 23.712,50.415 23.712,49.745 29.064,44.393 29.966,44.393 30.55,43.809 Designator6.19
620: Designator6.20 Designator13.30 | length 17
  Top Layer w0.254: Designator13.30 22.927,52.773 27.178,48.522 27.178,47.015 29.159,45.034 30.666,45.034 Designator6.20
701: Designator7.1 Designator11.43 | length 31.9
  Top Layer w0.254: Designator7.1 33.35,11.227 37.719,6.858 38.989,6.858 39.751,6.096 39.751,0.762 50.165,0.762 50.763,1.36 Designator11.43
702: Designator7.2 Designator11.44 | length 23
  Top Layer w0.254: Designator7.2 35.05,15.242 44.45,5.842 49.715,5.842 Designator11.44
703: Designator7.3 Designator11.41 | length 24.1
  Bottom Layer w0.254: Designator7.3 34.036,18.664 34.036,17.78 35.179,16.637 35.179,15.621 44.831,5.969 45.146,5.969 45.72,5.395 45.72,4.191 46.106,3.805 47.376,3.805 48.387,2.794 Designator11.41
704: Designator7.4 Designator11.42 | length 22.8
  Bottom Layer w0.254: Designator7.4 35.846,21.05 37.084,19.812 37.084,18.923 36.576,18.415 36.576,17.501 48.763,5.314 Designator11.42
705: Designator7.5 Designator11.39 | length 26.3
  Signal Layer 2 w0.254: Designator7.5 33.35,20.625 34.544,19.431 34.544,19.05 34.036,18.542 34.036,17.907 35.179,16.764 35.179,16.002 43.815,7.366 43.815,4.064 44.196,3.683 45.566,3.683 46.455,2.794 Designator11.39
706: Designator7.6 Designator11.40 | length 26.4
  Signal Layer 2 w0.254: Designator7.6 35.84,23.85 37.084,22.606 37.084,21.717 36.83,21.463 36.83,20.701 37.465,20.066 38.354,20.066 38.735,20.447 39.243,20.447 40.005,19.685 40.005,19.05 39.751,18.796 39.751,17.272 45.085,11.938 45.085,8.509 46.763,6.831 Designator11.40
707: Designator7.7 Designator12.19 | length 32.6
  Signal Layer 2 w0.254: Designator7.7 34.983,24.95 35.789,25.756 45.974,25.756 50.494,21.235 57.474,21.235 57.475,21.234 58.42,22.18 58.42,24.731 Designator12.19
708: Designator7.8 Designator12.20 | length 22
  Signal Layer 1 w0.254: Designator7.8 36.454,26.65 37.236,27.432 38.176,27.432 38.735,26.873 39.472,26.873 40.107,27.508 40.869,27.508 41.504,26.873 42.057,26.873 43.378,28.194 45.872,28.194 ; 45.923,28.143 47.684,26.382 Designator12.20
709: Designator7.9 Designator12.23 | length 27.4
  Signal Layer 2 w0.254: Designator7.9 34.988,27.75 35.89,26.848 36.652,26.848 37.338,27.534 38.125,27.534 38.837,26.822 39.472,26.822 40.183,27.534 40.945,27.534 41.808,26.67 42.24,26.67 43.307,27.737 50.317,27.737 53.95,31.369 55.782,31.369 Designator12.23
710: Designator7.10 Designator12.24 | length 21.5
  Bottom Layer w0.254: Designator7.10 35.138,29.362 36.627,29.362 37.49,28.499 43.205,28.499 43.84,27.864 44.227,27.864 44.278,27.813 50.317,27.813 52.886,30.382 Designator12.24
711: Designator7.11 Designator12.31 | length 26.7
  Bottom Layer w0.254: Designator7.11 34.843,30.55 35.712,31.42 44.806,31.42 48.235,34.849 51.232,34.849 53.797,37.414 55.801,37.414 Designator12.31
712: Designator7.12 Designator12.32 | length 22.3
  Bottom Layer w0.254: Designator7.12 36.339,32.25 41.173,37.084 50.775,37.084 52.073,38.382 Designator12.32
713: Designator7.13 Designator13.19 | length 27.3
  Top Layer w0.254: Designator13.19 34.011,56.574 34.011,54.635 32.893,53.518 32.893,44.041 33.223,43.711 33.223,42.951 32.36,42.088 32.36,41.58 34.417,39.522 34.417,38.633 33.858,38.075 33.858,37.287 34.188,36.957 34.188,35.636 33.35,34.798 Designator7.13
714: Designator7.14 Designator13.20 | length 21.8
  Signal Layer 2 w0.254: Designator13.20 32.927,54.424 34.214,53.137 34.214,41.453 34.061,41.3 34.061,40.411 34.392,40.081 34.392,39.065 34.163,38.837 34.163,37.135 35.05,36.248 Designator7.14
715: Designator7.15 Designator13.17 | length 27.8
  Signal Layer 2 w0.254: Designator7.15 33.35,37.872 32.487,38.735 32.487,39.421 33.299,40.234 33.299,40.716 32.41,41.605 32.41,42.215 33.376,43.18 33.376,53.061 31.928,54.508 31.928,58.268 32.36,58.699 33.886,58.699 Designator13.17
716: Designator7.16 Designator13.18 | length 19.4
  Signal Layer 2 w0.254: Designator13.18 34.927,53.922 36.017,52.832 36.017,43.18 35.23,42.393 35.23,41.605 36.144,40.691 36.144,40.488 35.05,39.393 Designator7.16
717: Designator7.17 Designator13.15 | length 20.2
  Signal Layer 1 w0.254: Designator7.17 33.35,40.335 34.188,41.173 34.188,52.553 35.941,54.305 35.941,56.672 Designator13.15
718: Designator7.18 Designator13.16 | length 15.8
  Signal Layer 1 w0.254: Designator7.18 35.05,42.111 36.22,43.282 36.22,53.086 36.927,53.793 Designator13.16
719: Designator7.19 Designator13.13 | length 18.2
  Top Layer w0.254: Designator7.19 33.655,42.055 33.655,50.19 37.922,54.458 37.922,56.653 Designator13.13
720: Designator7.20 Designator13.14 | length 13.8
  Top Layer w0.254: Designator7.20 35.05,49.934 38.927,53.811 Designator13.14
801: Designator8.1 Designator11.47 | length 25.8
  Top Layer w0.254: Designator8.1 42.54,10.16 42.54,9.403 45.466,6.477 51.562,6.477 52.197,5.842 53.467,5.842 53.848,5.461 53.848,3.709 Designator11.47
802: Designator8.2 Designator11.48 | length 24.5
  Top Layer w0.254: Designator8.2 37.85,16.252 43.561,10.541 43.561,9.652 46.228,6.985 51.689,6.985 52.324,6.35 53.721,6.35 54.763,5.308 Designator11.48
803: Designator8.3 Designator11.45 | length 26.2
  Signal Layer 1 w0.254: Designator8.3 36.15,17.825 37.592,16.383 37.592,15.494 46.355,6.731 51.054,6.731 51.91,5.875 51.91,3.647 Designator11.45
804: Designator8.4 Designator11.46 | length 25.9
  Signal Layer 1 w0.254: Designator8.4 37.85,19.689 36.957,18.796 36.957,17.78 37.973,16.764 37.973,15.875 46.609,7.239 51.181,7.239 52.763,5.657 Designator11.46
805: Designator8.5 Designator12.11 | length 25.7
  Top Layer w0.254: Designator8.5 37.492,22.15 40.081,24.74 40.894,24.74 41.631,24.003 42.316,24.003 43.028,24.714 44.399,24.714 51.714,17.399 55.786,17.399 Designator12.11
806: Designator8.6 Designator12.12 | length 19.2
  Signal Layer 2 w0.254: Designator8.6 38.939,23.85 42.875,19.914 49.555,19.914 51.087,18.382 Designator12.12
807: Designator8.7 Designator12.17 | length 30
  Signal Layer 1 w0.254: Designator8.7 37.574,24.95 38.43,25.806 39.421,25.806 40.615,24.613 40.919,24.613 42.824,22.708 46.812,22.708 50.165,19.355 57.48,19.355 57.861,19.736 57.861,23.29 Designator12.17
808: Designator8.8 Designator12.18 | length 19.6
  Signal Layer 1 w0.254: Designator8.8 38.262,26.238 40.005,26.238 40.513,25.73 41.535,25.73 43.617,27.813 45.288,27.813 48.719,24.382 Designator12.18
809: Designator8.9 Designator12.25 | length 24.3
  Signal Layer 1 w0.254: Designator8.9 36.15,27.813 37.44,27.813 38.227,28.6 44.044,28.6 44.679,29.235 44.679,30.836 46.225,32.382 52.042,32.382 53.01,33.35 55.801,33.35 Designator12.25
810: Designator8.10 Designator12.26 | length 18.8
  Signal Layer 2 w0.254: Designator8.10 38.901,29.45 39.675,28.677 41.173,28.677 44.78,32.283 54.67,32.283 Designator12.26
811: Designator8.11 Designator12.33 | length 25.3
  Signal Layer 2 w0.254: Designator8.11 37.51,30.55 38.43,31.471 42.342,31.471 42.596,31.725 42.596,32.715 49.276,39.395 55.782,39.395 Designator12.33
812: Designator8.12 Designator12.34 | length 20.3
  Signal Layer 2 w0.254: Designator8.12 39.159,32.25 47.291,40.382 Designator12.34
813: Designator8.13 Designator12.39 | length 27.5
  Signal Layer 2 w0.254: Designator8.13 36.15,34.55 46.711,45.11 48.616,45.11 50.876,47.371 55.78,47.371 Designator12.39
814: Designator8.14 Designator12.40 | length 21.6
  Signal Layer 2 w0.254: Designator8.14 39.419,35.05 50.751,46.382 Designator12.40
815: Designator8.15 Designator13.11 | length 23.8
  Signal Layer 2 w0.254: Designator8.15 36.15,37.344 37.313,38.506 37.313,39.776 36.881,40.208 36.881,41.25 38.989,43.358 38.989,52.172 39.903,53.086 39.903,56.634 Designator13.11
816: Designator8.16 Designator13.12 | length 19.8
  Signal Layer 2 w0.254: Designator8.16 37.85,39.12 41.808,43.078 41.808,52.984 40.927,53.866 Designator13.12
817: Designator8.17 Designator13.9 | length 21.5
  Signal Layer 1 w0.254: Designator8.17 36.15,40.265 37.008,41.123 37.008,48.362 41.885,53.238 41.885,56.616 Designator13.9
818: Designator8.18 Designator13.10 | length 17.1
  Signal Layer 1 w0.254: Designator8.18 37.85,42.016 39.04,43.205 39.04,48.565 42.927,52.452 Designator13.10
819: Designator8.19 Designator13.7 | length 19.5
  Top Layer w0.254: Designator8.19 36.15,46.259 43.917,54.026 43.917,56.648 Designator13.7
820: Designator8.20 Designator13.8 | length 15.1
  Top Layer w0.254: Designator8.20 37.85,46.689 44.933,53.772 44.933,55.652 Designator13.8
901: Designator9.1 Designator11.49 | length 25.3
  Top Layer w0.254: Designator9.1@38.95,16.549 43.942,11.557 43.942,10.414 46.99,7.366 52.07,7.366 52.705,6.731 54.737,6.731 55.753,5.715 55.753,3.804 Designator11.49
902: Designator9.2 Designator11.50 | length 24.6
  Top Layer w0.254: Designator9.2 40.65,15.865 44.704,11.811 44.704,10.414 47.244,7.874 52.166,7.874 52.928,7.112 55.626,7.112 56.763,5.975 Designator11.50
903: Designator9.3 Designator12.5 | length 22.8
  Signal Layer 1 w0.254: Designator9.3 38.95,18.2 41.91,15.24 49.911,15.24 51.622,13.529 51.622,12.386 52.578,11.43 55.817,11.43 Designator12.5
904: Designator9.4 Designator12.6 | length 20.9
  Signal Layer 1 w0.254: Designator9.4 40.65,19.695 39.624,18.669 39.624,18.065 40.29,17.399 42.672,17.399 44.323,15.748 50.14,15.748 50.876,15.011 52.045,15.011 54.674,12.382 Designator12.6
905: Designator9.5 Designator12.9 | length 21
  Signal Layer 1 w0.254: Designator9.5 40.639,22.15 42.723,20.066 46.558,20.066 51.181,15.443 55.83,15.443 Designator12.9
906: Designator9.6 Designator12.10 | length 17.2
  Signal Layer 1 w0.254: Designator9.6 41.098,23.85 42.799,22.149 46.507,22.149 52.274,16.382 Designator12.10
907: Designator9.7 Designator12.15 | length 20.7
  Top Layer w0.254: Designator9.7 38.95,25.121 40.716,25.121 41.504,25.908 45.161,25.908 49.809,21.26 55.647,21.26 Designator12.15
908: Designator9.8 Designator12.16 | length 16.7
  Top Layer w0.254: Designator9.8 42.296,26.65 43.282,27.635 45.669,27.635 50.902,22.403 Designator12.16@54.748,22.403
909: Designator9.9 Designator12.27 | length 24.7
  Top Layer w0.254: Designator9.9 40.728,27.75 41.447,27.031 42.139,27.031 43.276,28.169 46.33,28.169 47.422,27.076 48.158,27.076 51.181,30.099 51.181,33.249 53.315,35.382 55.769,35.382 Designator12.27
910: Designator9.10 Designator12.28 | length 16.2
  Signal Layer 1 w0.254: Designator9.10 41.998,29.45 46.253,33.706 52.248,33.706 52.883,34.341 54.728,34.341 Designator12.28
911: Designator9.11 Designator12.35 | length 22.7
  Signal Layer 1 w0.254: Designator9.11 40.405,30.55 43.155,33.299 45.085,33.299 53.188,41.402 55.789,41.402 Designator12.35
912: Designator9.12 Designator12.36 | length 19.4
  Signal Layer 1 w0.254: Designator9.12 40.65,33.462 41.58,34.392 42.774,34.392 43.231,33.934 44.704,33.934 53.152,42.382 Designator12.36
913: Designator9.13 Designator12.41 | length 24.6
  Signal Layer 1 w0.254: Designator9.13 39.946,33.35 41.825,35.23 42.469,35.23 52.832,45.593 52.832,46.457 53.823,47.447 55.834,47.447 Designator12.41
914: Designator9.14 Designator12.42 | length 21
  Signal Layer 1 w0.254: Designator9.14 40.65,36.154 43.707,39.211 44.85,39.211 49.821,44.182 49.821,45.325 52.878,48.382 Designator12.42
915: Designator9.15 Designator12.45 | length 27.8
  Signal Layer 1 w0.254: Designator9.15 38.95,37.375 46.584,45.009 48.266,45.009 51.511,48.254 51.511,51.257 53.619,53.365 55.786,53.365 Designator12.45
916: Designator9.16 Designator12.46 | length 21
  Signal Layer 1 w0.254: Designator9.16 41.646,37.85 52.629,48.833 52.629,50.242 Designator12.46
917: Designator9.17 Designator13.5 | length 22
  Signal Layer 1 w0.254: Designator9.17 39.001,38.95 39.878,39.827 39.878,47.777 45.923,53.823 45.923,56.654 Designator13.5
918: Designator9.18 Designator13.6 | length 17.6
  Signal Layer 1 w0.254: Designator9.18 40.65,41.971 42.85,44.171 42.85,49.454 46.927,53.531 Designator13.6
919: Designator9.19 Designator13.3 | length 22
  Top Layer w0.254: Designator9.19 40.353,41.75 42.139,43.536 42.139,47.549 48.971,54.381 49.378,54.381 49.962,54.966 49.962,56.623 Designator13.3
920: Designator9.20 Designator13.4 | length 16.2
  Top Layer w0.254: Designator9.20 40.65,48.27 46.177,53.797 47.066,53.797 Designator13.4
1001: Designator10.1 Designator12.1 | length 20.6
  Top Layer w0.254: Designator10.1 41.75,15.4 45.085,12.065 45.085,10.795 47.498,8.382 52.197,8.382 53.086,7.493 55.88,7.493 Designator12.1
1002: Designator10.2 Designator12.2 | length 18.4
  Top Layer w0.254: Designator10.2 43.45,14.716 45.466,12.7 45.466,11.176 47.752,8.89 52.705,8.89 53.213,8.382 Designator12.2
1003: Designator10.3 Designator12.3 | length 22.7
  Top Layer w0.254: Designator10.3 44.023,19.35 44.958,18.415 44.958,15.621 45.847,14.732 48.641,14.732 50.165,13.208 50.165,10.541 51.308,9.398 55.785,9.398 Designator12.3
1004: Designator10.4 Designator12.4 | length 16.2
  Top Layer w0.254: Designator10.4 44.863,21.05 53.467,12.446 53.467,11.684 Designator12.4
1005: Designator10.5 Designator12.7 | length 19
  Top Layer w0.254: Designator10.5 44.754,22.15 53.492,13.411 55.798,13.411 Designator12.7
1006: Designator10.6 Designator12.8 | length 15.2
  Top Layer w0.254: Designator10.6 44.197,23.85 53.665,14.382 Designator12.8
1007: Designator10.7 Designator12.13 | length 18.1
  Top Layer w0.254: Designator10.7 41.968,24.95 42.418,25.4 44.679,25.4 50.673,19.406 55.793,19.406 Designator12.13
1008: Designator10.8 Designator12.14 | length 13.9
  Signal Layer 1 w0.254: Designator10.8 45.588,26.65 51.856,20.382 Designator12.14
1009: Designator10.9 Designator12.29 | length 20.1
  Top Layer w0.254: Designator10.9 41.75,28.847 49.285,36.382 51.927,36.382 52.934,37.389 55.762,37.389 Designator12.29
1010: Designator10.10 Designator12.30 | length 14.2
  Top Layer w0.254: Designator10.10 49.408,35.408 51.867,35.408 52.841,36.382 Designator12.30
1011: Designator10.11 Designator12.37 | length 24.2
  Top Layer w0.254: Designator10.11 42.869,30.55 53.746,41.427 57.658,41.427 58.268,42.037 58.268,42.883 Designator12.37
1012: Designator10.12 Designator12.38 | length 16.8
  Top Layer w0.254: Designator10.12 43.45,33.063 Designator12.38
1013: Designator10.13 Designator12.43 | length 27.3
  Top Layer w0.254: Designator10.13 43.002,33.35 53.162,43.51 53.162,44.552 53.975,45.364 57.658,45.364 58.217,45.923 58.217,48.934 Designator12.43
1014: Designator10.14 Designator12.44 | length 20
  Top Layer w0.254: Designator10.14 52.68,44.28 52.68,48.293 Designator12.44
1015: Designator10.15 Designator12.47 | length 29
  Top Layer w0.254: Designator10.15 43.16,36.15 52.121,45.11 52.121,50.292 53.188,51.359 57.506,51.359 58.242,52.095 58.242,52.909 Designator12.47
1016: Designator10.16 Designator12.48 | length 21.2
  Top Layer w0.254: Designator10.16 51.511,45.911 51.511,51.124 Designator12.48
1017: Designator10.17 Designator12.49 | length 25.6
  Top Layer w0.254: Designator10.17 43.344,38.95 50.952,46.558 50.952,52.222 54.127,55.397 55.784,55.397 Designator12.49
1018: Designator10.18 Designator12.50 | length 21
  Top Layer w0.254: Designator10.18 44.028,40.65 50.368,46.99 50.368,52.324 54.426,56.382 Designator12.50
1019: Designator10.19 Designator13.1 | length 22.2
  Top Layer w0.254: Designator10.19 43.655,41.75 45.009,43.104 45.009,48.26 51.206,54.458 51.613,54.458 52.273,55.118 52.273,56.312 Designator13.1
1020: Designator10.20 Designator13.2 | length 15.3
  Top Layer w0.254: Designator10.20 43.45,47.59 50.927,55.067 Designator13.2
3187: 
copper on no net: | length 240
  Top Layer w0.254: 0,0 0,60 60,60 60,0 0,0
  other v1: 12.5,12.5 30,12.5 47.5,12.5 12.5,30 47.5,30 12.5,47.5 30,47.5 47.5,47.5
  other v2: 16.55,2539.975 18.25,2541.675

## Other copper
Bottom Layer:
  text "zhang" at 52.578,58.191 h1.52

## Silkscreen, mask and mechanical layers (free items; w line width, h text height)
Mechanical 1:
  lines w0.254: 60,0 60,60 0,60 0,0 60,0 ; 60,0 60,0

## Text inside footprints (layer, text, board x,y; h text height)
Designator11: Top Overlay "2" at 7.239,4.699 h0.51; Top Overlay "1" at 7.366,2.413 h0.51
Designator12: Top Overlay "2" at 54.864,6.858 h0.51 r90; Top Overlay "1" at 57.15,6.985 h0.51 r90
Designator13: Top Overlay "2" at 52.451,55.753 h0.51 r180; Top Overlay "1" at 52.299,57.836 h0.51 r180
Designator14: Top Overlay "2" at 4.572,53.34 h0.51 r270; Top Overlay "1" at 2.286,53.213 h0.51 r270